# Altium PCB PCB.PcbDoc
Units mil, origin at the board's own origin, x right, y up, seen from the top; angles counter-clockwise.
Board outline 5780 x 8360 mil, 2 copper layers (Top Layer, Bottom Layer); 141 components, 130 nets, 576 pads, 12 vias.
Unrouted connection lines stored in the file: 380.
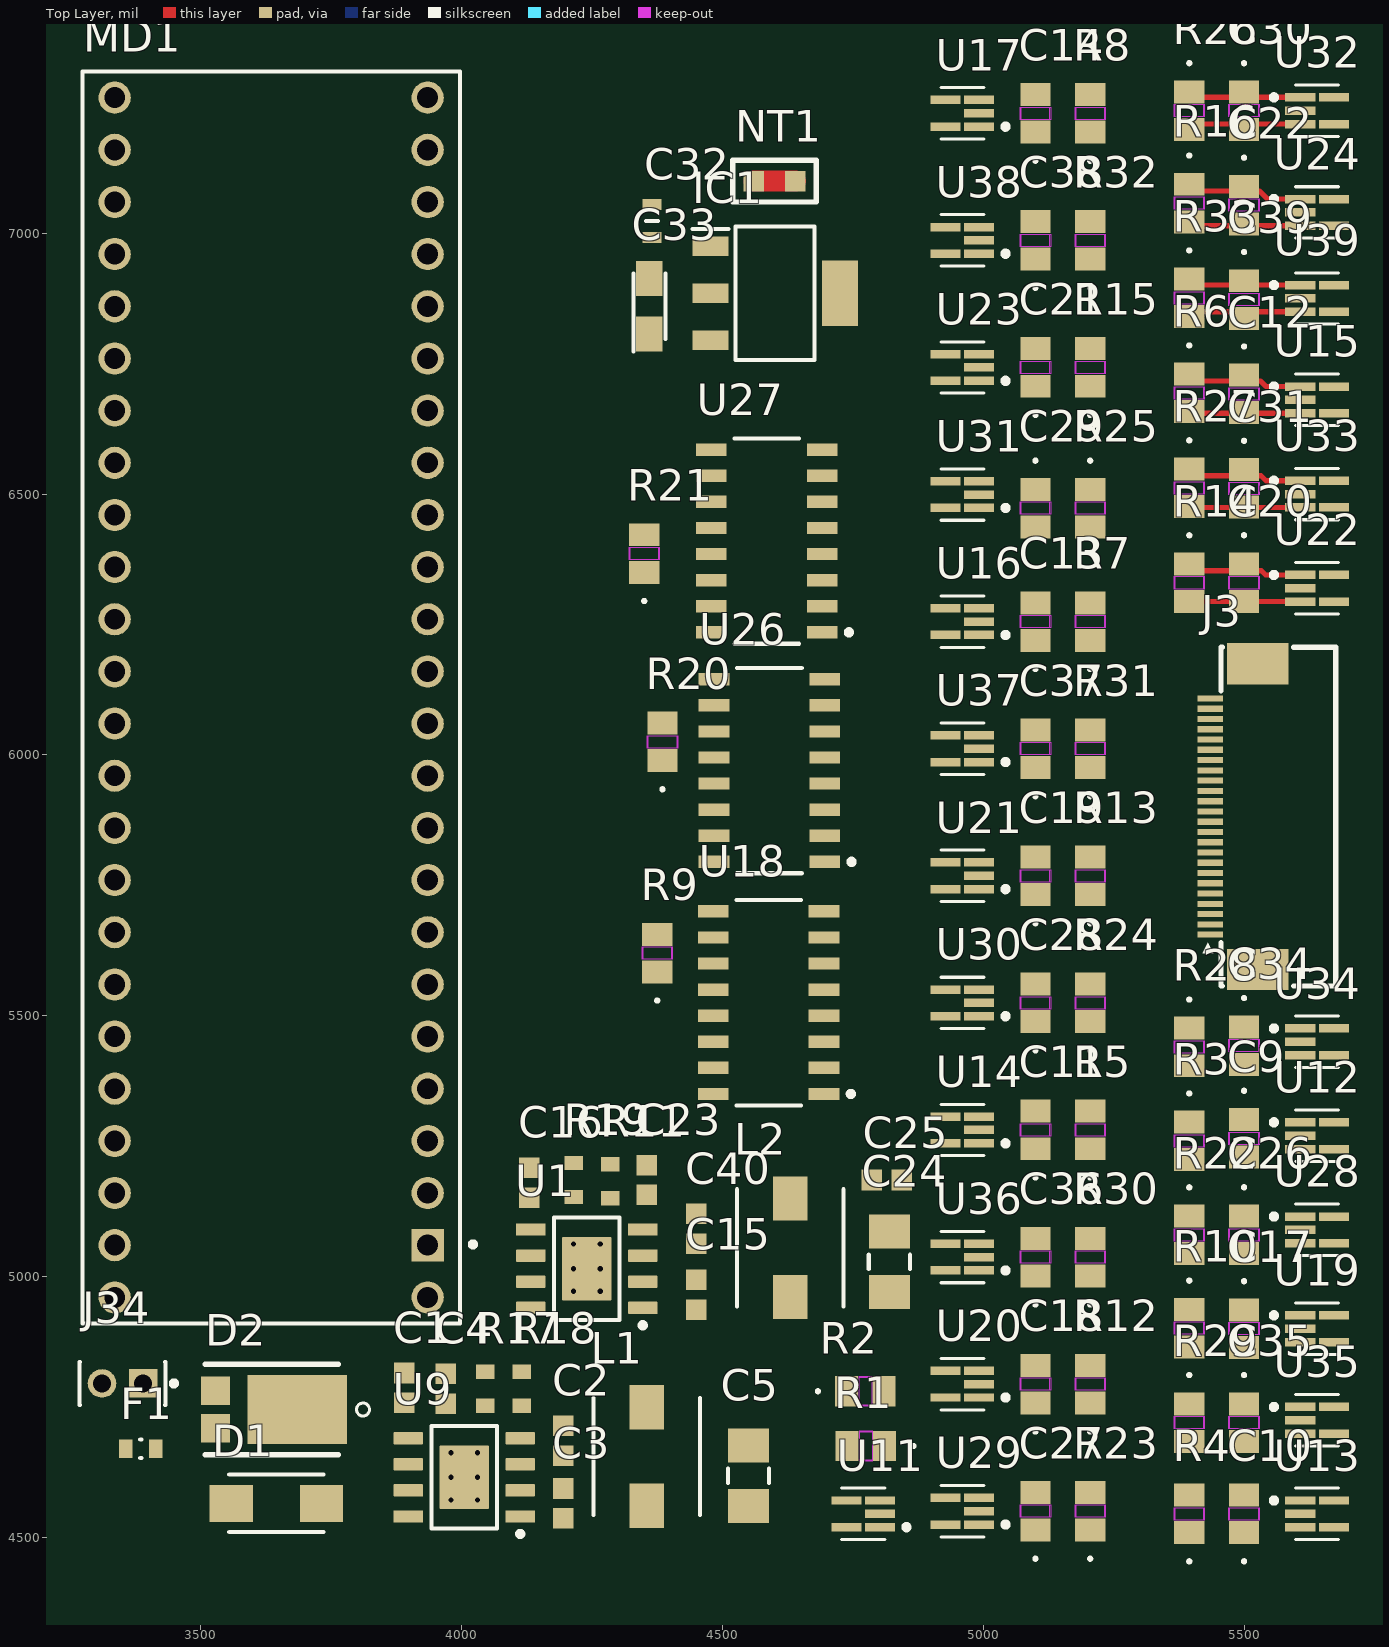
[diagram p0: Top Layer view]
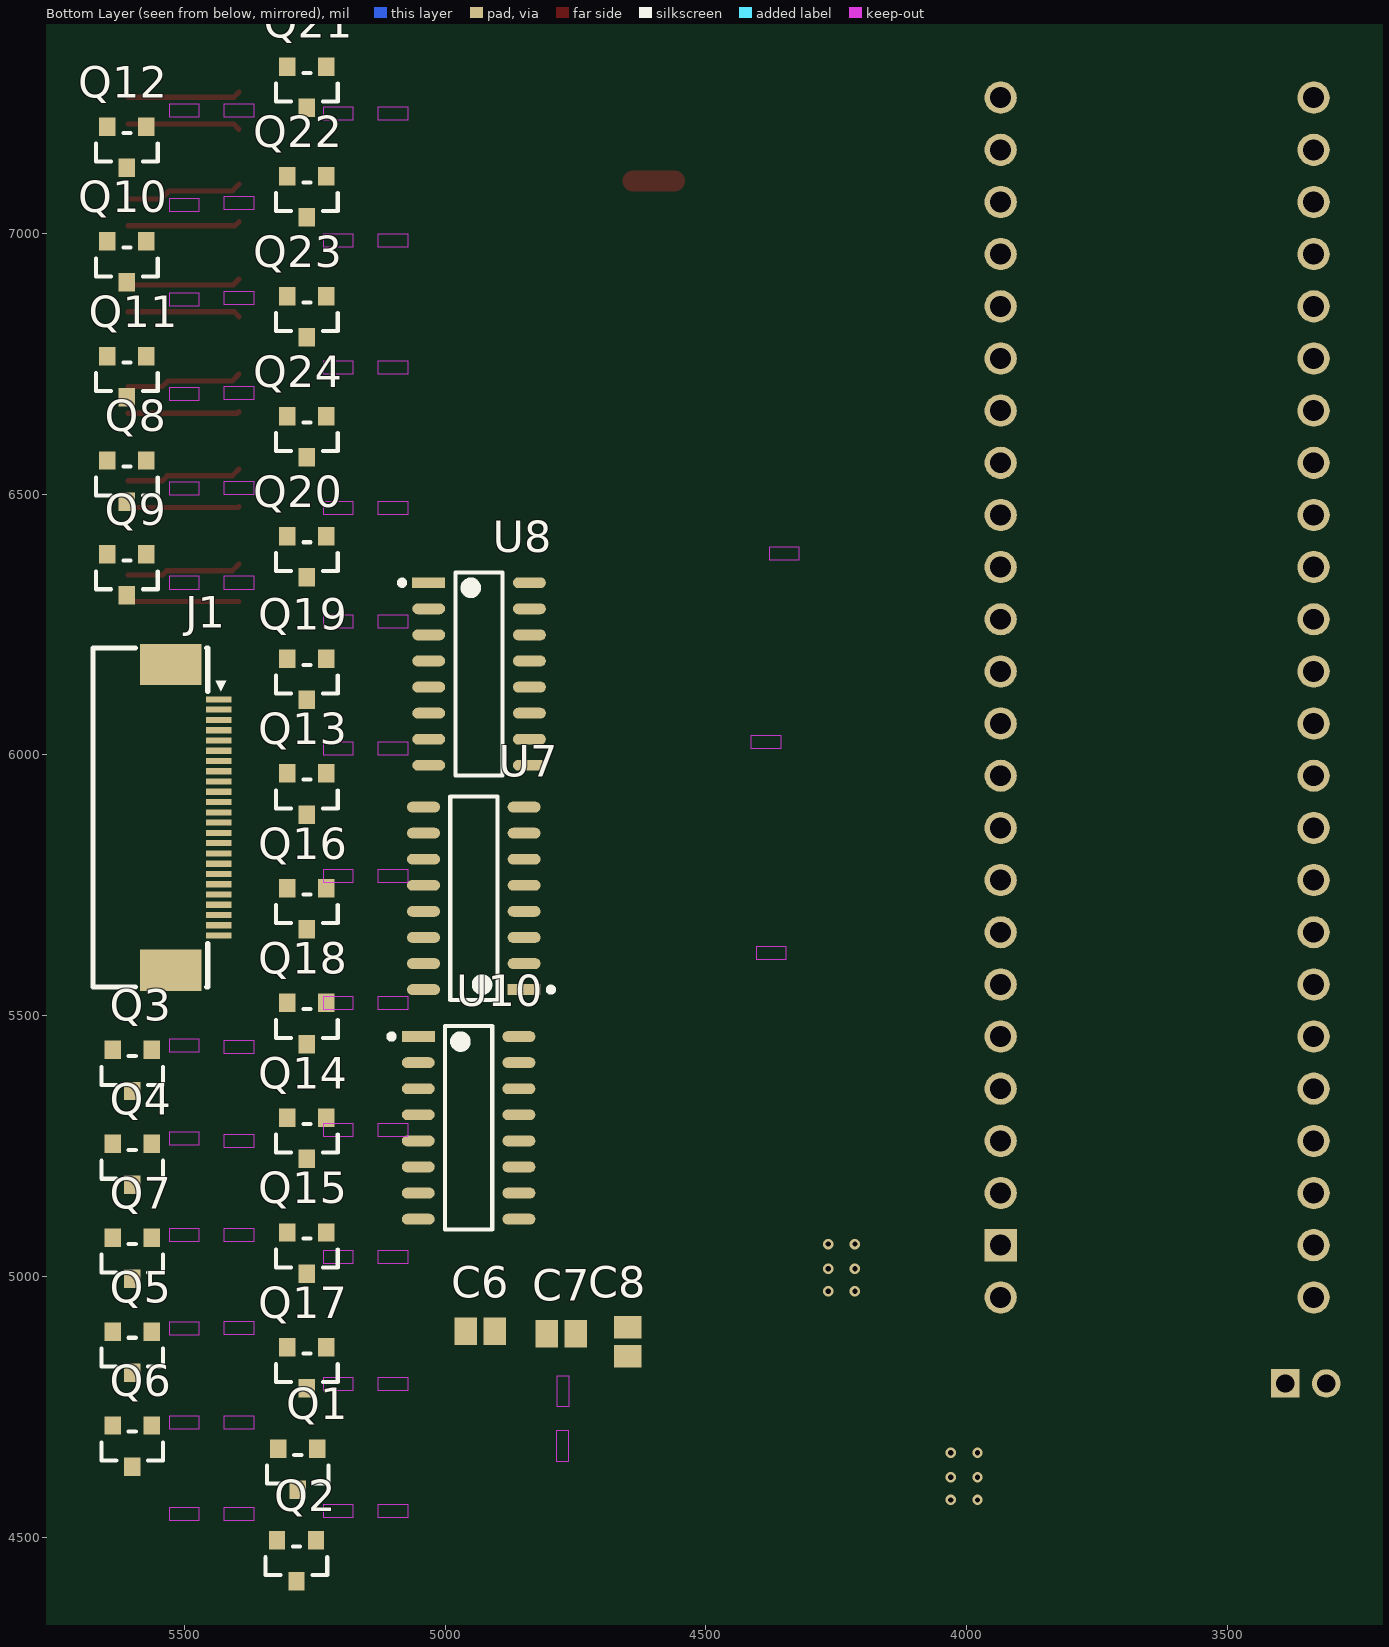
[diagram p1: Bottom Layer view, seen from below]

## Layer stack, top to bottom
Top Solder: solder mask 0.4, Solder Resist, Dk 3.5
Top Layer: signal copper 1.4
Dielectric 1: dielectric 12.6, FR-4, Dk 4.8
Bottom Layer: signal copper 1.4
Bottom Solder: solder mask 0.4, Solder Resist, Dk 3.5

## Board outline
0,1510 0,9870 5780,9870 5780,1510

## Design rules (kind name [scope] priority, off if disabled: settings)
BoardOutlineClearance [All] p1: gap=50 ignorepadtopadclearanceinfootprint=FALSE except(0: Arc-OutlineEdge Track-OutlineEdge Text-OutlineEdge; 20: SMDPad-OutlineEdge THPad-OutlineEdge Via-OutlineEdge Fill-OutlineEdge Region-OutlineEdge)
Clearance [All] p1: gap=6 ignorepadtopadclearanceinfootprint=FALSE
DiffPairsRouting [All] p1: maxlimit=8 minlimit=8 mostfreqgap=8 toplayer_minwidth=8 toplayer_maxwidth=15 toplayer_prefwidth=15 bottomlayer_minwidth=8 bottomlayer_maxwidth=15 bottomlayer_prefwidth=15 maxuncoupledlength=500
HoleSize [All] p1: absolutevalues=TRUE maxlimit=500 minlimit=10 maxpercent=80.000 minpercent=20.000
MinimumAnnularRing [All] p1: minimumring=5
MinimumSolderMaskSliver [All] p1 off: minsoldermaskwidth=10
NetAntennae NetAntennae_MountingHoles [IsVia And InComponent('M*')] p1: netantennaetolerance=-1
NetAntennae [All] p2: netantennaetolerance=0
PlaneConnect [All] p1: planeconnectstyle=Direct reliefexpansion=20 reliefentries=4 reliefconductorwidth=10 reliefairgap=10
PolygonConnect PolygonConnect_Relief [IsPad and not (InComponent('M*'))] p1: connectstyle=Direct reliefconductorwidth=10 reliefentries=4 polygonreliefangle="90 Angle" airgapwidth=10
PolygonConnect PolygonConnect_Direct [All] p2: connectstyle=Direct reliefconductorwidth=10 reliefentries=4 polygonreliefangle="90 Angle" airgapwidth=10
RoutingVias [All] p1: holewidth=16 width=32 viastyle="Through Hole" minholewidth=10 minwidth=20 maxholewidth=100 maxwidth=200
ShortCircuit "Mounting Hole Exception" [IsVia And InComponent('M*') vs InComponent('M*')] p1: allowed=TRUE
ShortCircuit [All] p2: allowed=FALSE
SilkToSilkClearance [All] p1 off: silktosilkclearance=10
SilkToSolderMaskClearance [IsPad] p1 off: minsilkscreentomaskgap=10 clearancetoexposedcopper=TRUE
SolderMaskExpansion SolderMaskExpansion_via [IsVia] p1: expansion=4 istentingtop=TRUE
SolderMaskExpansion [All] p2: expansion=2 istentingtop=FALSE
Width [All] p1: maxlimit=500 minlimit=6 preferedwidth=10 minimp=50.000000 maximp=50.000000 favimp=50.000000
22 further rules are at their usual default settings.

## Classes and differential pairs
component class Schematic: C1 C2 C4 C5 C32 C33 C39 D1 D2 IC1 NT1 R3 R17 R18 U13

## Components (designator, comment, footprint, x,y, rotation, side; value= is the part's Value field where it differs from the comment)
C1 "10uF" CAP_SM0603_YAGEOCC2_N 3890,4786.38 r90 top
C2 "2.2uF" CAP_SM0603_YAGEOCC2_N 4195,4685 r90 top
C3 "100nF" CAP_SM0603_YAGEOCC2_N 4195,4565 r270 top
C4 "47pF" CAP_SM0603_YAGEOCC2_N 3970,4785 r270 top
C5 "100uF" FP-GRM31C-0_3-e0_3_0_8-IPC_A 4550,4618.09 r270 top
C6 "100pF" CAPC2013X140X50LL20T25 4932.56,4895 r180 bottom
C7 "100pF" CAPC2013X140X50LL20T25 4777.56,4890 r180 bottom
C8 "100pF" CAPC2013X140X50LL20T25 4650,4875 r90 bottom
C9 "Capacitor" CAP_R15_JOD 5500,5265 r270 top value=10pF
C10 "Capacitor" CAP_R15_JOD 5500,4545 r90 top value=10pF
C11 "Capacitor" CAP_R15_JOD 5100,5280.91 r90 top value=10pF
C12 "Capacitor" CAP_R15_JOD 5500,6692 r270 top value=10pF
C13 "Capacitor" CAP_R15_JOD 5100,6255.45 r90 top value=10pF
C14 "Capacitor" CAP_R15_JOD 5100,7230 r90 top value=10pF
C15 "100nF" CAP_SM0603_YAGEOCC2_N 4450,4965 r270 top
C16 "10uF" CAP_SM0603_YAGEOCC2_N 4130,5180 r90 top
C17 "Capacitor" CAP_R15_JOD 5500,4900 r270 top value=10pF
C18 "Capacitor" CAP_R15_JOD 5100,4793.64 r90 top value=10pF
C19 "Capacitor" CAP_R15_JOD 5100,5768.18 r90 top value=10pF
C20 "Capacitor" CAP_R15_JOD 5500,6330 r270 top value=10pF
C21 "Capacitor" CAP_R15_JOD 5100,6742.73 r90 top value=10pF
C22 "Capacitor" CAP_R15_JOD 5500,7054 r270 top value=10pF
C23 "75pF" CAP_SM0603_YAGEOCC2_N 4355,5185 r270 top
C24 "100uF" FP-GRM31C-0_3-e0_3_0_8-IPC_A 4820,5028.09 r90 top
C25 "47uF" CAP_SM0603_YAGEOCC2_N 4815,5185 r180 top
C26 "Capacitor" CAP_R15_JOD 5500,5080 r270 top value=10pF
C27 "Capacitor" CAP_R15_JOD 5100,4550 r90 top value=10pF
C28 "Capacitor" CAP_R15_JOD 5100,5524.55 r90 top value=10pF
C29 "Capacitor" CAP_R15_JOD 5100,6473.09 r270 top value=10pF
C30 "Capacitor" CAP_R15_JOD 5500,7235 r270 top value=10pF
C31 "Capacitor" CAP_R15_JOD 5500,6511 r270 top value=10pF
C32 "470nF" CAPC1608X90N 4365,7023.5 r270 top
C33 "47uF" CAPPM3216X180N 4360,6860 r90 top
C34 "Capacitor" CAP_R15_JOD 5500,5442.76 r270 top value=10pF
C35 "Capacitor" CAP_R15_JOD 5500,4720 r270 top value=10pF
C36 "Capacitor" CAP_R15_JOD 5100,5037.27 r90 top value=10pF
C37 "Capacitor" CAP_R15_JOD 5100,6011.82 r90 top value=10pF
C38 "Capacitor" CAP_R15_JOD 5100,6986.36 r90 top value=10pF
C39 "Capacitor" CAP_R15_JOD 5500,6873 r270 top value=10pF
C40 "2.2uF" CAP_SM0603_YAGEOCC2_N 4450,5091.38 r270 top
D1 "SMAJ30CA" LFUS-DO-214AC-A-2_V 3645,4565 r180 top
D2 "SBRT15U50SP5-13" SBRT15U50SP5-13 3685,4745 r270 top
F1 "500mA" FP-SF-0603S-MFG 3385,4670 r0 top value=232mΩ
IC1 "LM3940IMPX-3.3_NOPB" SOT230P700X180-4N 4600.98,6885 r0 top
J1 "690367282476" FPC-SMD_24P-P0.50_05A20L24P 5480,5880 r270 bottom
J3 "690367282476" FPC-SMD_24P-P0.50_05A20L24P 5480.77,5881.73 r90 top
J34 "TMM-102-03-F-S" FP-TMM-102-03-F-S-MFG 3350,4795 r180 top
L1 "SRP5030TA-100M, 10uH" INDPM5752X300N 4355,4655 r90 top
L2 "6.8uH" INDPM5752X300N 4630,5055 r90 top
MD1 "DEV-16996" FP-DEV-16996-MFG 3635,6110 r90 top
NT1 "Net Tie" Net_Tie_80mil 4560,7100 r0 top net-tie
Q1 "DMP2004K-7" FP-SOT23-MFG 5282.4,4630.63 r270 bottom
Q2 "DMP2004K-7" FP-SOT23-MFG 5285,4455 r270 bottom
Q3 "DMP2004K-7" FP-SOT23-MFG 5600,5395 r270 bottom
Q4 "DMP2004K-7" FP-SOT23-MFG 5600,5215 r270 bottom
Q5 "DMP2004K-7" FP-SOT23-MFG 5600,4855 r270 bottom
Q6 "DMP2004K-7" FP-SOT23-MFG 5600,4675 r270 bottom
Q7 "DMP2004K-7" FP-SOT23-MFG 5600,5035 r270 bottom
Q8 "DMP2004K-7" FP-SOT23-MFG 5610,6525 r270 bottom
Q9 "DMP2004K-7" FP-SOT23-MFG 5610,6345 r270 bottom
Q10 "DMP2004K-7" FP-SOT23-MFG 5610,6945 r270 bottom
Q11 "DMP2004K-7" FP-SOT23-MFG 5610,6725 r270 bottom
Q12 "DMP2004K-7" FP-SOT23-MFG 5610,7165 r270 bottom
Q13 "DMP2004K-7" FP-SOT23-MFG 5265,5925 r270 bottom
Q14 "DMP2004K-7" FP-SOT23-MFG 5265,5265 r270 bottom
Q15 "DMP2004K-7" FP-SOT23-MFG 5265,5045 r270 bottom
Q16 "DMP2004K-7" FP-SOT23-MFG 5265,5705 r270 bottom
Q17 "DMP2004K-7" FP-SOT23-MFG 5265,4825 r270 bottom
Q18 "DMP2004K-7" FP-SOT23-MFG 5265,5485 r270 bottom
Q19 "DMP2004K-7" FP-SOT23-MFG 5265,6145 r270 bottom
Q20 "DMP2004K-7" FP-SOT23-MFG 5265,6380 r270 bottom
Q21 "DMP2004K-7" FP-SOT23-MFG 5265,7280 r270 bottom
Q22 "DMP2004K-7" FP-SOT23-MFG 5265,7070 r270 bottom
Q23 "DMP2004K-7" FP-SOT23-MFG 5265,6840 r270 bottom
Q24 "DMP2004K-7" FP-SOT23-MFG 5265,6610 r270 bottom
R1 "Resistor" CAP_R15_JOD 4775,4675 r180 top value=10K
R2 "Resistor" CAP_R15_JOD 4774,4780 r0 top value=15K
R3 "Resistor" CAP_R15_JOD 5395,5260 r270 top value=180
R4 "Resistor" CAP_R15_JOD 5395,4545 r90 top value=180
R5 "Resistor" CAP_R15_JOD 5205,5280.91 r90 top value=180
R6 "Resistor" CAP_R15_JOD 5395,6694 r270 top value=180
R7 "Resistor" CAP_R15_JOD 5205,6255.45 r90 top value=180
R8 "Resistor" CAP_R15_JOD 5205,7230 r90 top value=180
R9 "Resistor" CAP_R15_JOD 4375,5620 r90 top value=10k
R10 "Resistor" CAP_R15_JOD 5395,4901 r270 top value=180
R11 "51k 0.1%" RES_SM0603_YAGEORC_N 4285,5182.44 r90 top value=1K
R12 "Resistor" CAP_R15_JOD 5205,4793.64 r90 top value=180
R13 "Resistor" CAP_R15_JOD 5205,5768.18 r90 top value=180
R14 "Resistor" CAP_R15_JOD 5395,6330 r270 top value=180
R15 "Resistor" CAP_R15_JOD 5205,6742.73 r90 top value=180
R16 "Resistor" CAP_R15_JOD 5395,7058 r270 top value=180
R17 "88K7" RES_SM0603_YAGEORC_N 4045,4785 r90 top
R18 "22K1" RES_SM0603_YAGEORC_N 4115,4785 r270 top
R19 "22k1 0.1%" RES_SM0603_YAGEORC_N 4215,5185 r270 top value=1K
R20 "Resistor" CAP_R15_JOD 4385,6025 r90 top value=10K
R21 "Resistor" CAP_R15_JOD 4350,6386 r90 top value=10K
R22 "Resistor" CAP_R15_JOD 5395,5080 r270 top value=180
R23 "Resistor" CAP_R15_JOD 5205,4550 r90 top value=180
R24 "Resistor" CAP_R15_JOD 5205,5524.55 r90 top value=180
R25 "Resistor" CAP_R15_JOD 5205,6473.09 r270 top value=180
R26 "Resistor" CAP_R15_JOD 5395,7235 r270 top value=180
R27 "Resistor" CAP_R15_JOD 5395,6512 r270 top value=180
R28 "Resistor" CAP_R15_JOD 5395,5440 r270 top value=180
R29 "Resistor" CAP_R15_JOD 5395,4720 r270 top value=180
R30 "Resistor" CAP_R15_JOD 5205,5037.27 r90 top value=180
R31 "Resistor" CAP_R15_JOD 5205,6011.82 r90 top value=180
R32 "Resistor" CAP_R15_JOD 5205,6986.36 r90 top value=180
R33 "Resistor" CAP_R15_JOD 5395,6876 r270 top value=180
U1 "LMR23630-Q1" DDA0008E_N 4240,5015 r180 top
U7 "74HC595D,118" FP-SOT109-1-IPC_C 4945,5725 r0 bottom
U8 "74HC595D,118" FP-SOT109-1-IPC_C 4935,6155 r180 bottom
U9 "LMR23630-Q1" DDA0008E_N 4005,4615 r180 top
U10 "74HC595D,118" FP-SOT109-1-IPC_C 4955,5285 r180 bottom
U11 "Ideal Operational Amplifier" DCK0005A-IPC_B 4770,4545 r180 top
U12 "Ideal Operational Amplifier" DCK0005A-IPC_B 5640,5270 r0 top
U13 "Ideal Operational Amplifier" DCK0005A-IPC_B 5640,4545 r0 top
U14 "Ideal Operational Amplifier" DCK0005A-IPC_B 4960,5280.91 r180 top
U15 "Ideal Operational Amplifier" DCK0005A-IPC_B 5640,6680.59 r0 top
U16 "Ideal Operational Amplifier" DCK0005A-IPC_B 4960,6255.45 r180 top
U17 "Ideal Operational Amplifier" DCK0005A-IPC_B 4960,7230 r180 top
U18 "MCP3008T-I/SL" FP-C04-108-MFG 4588.7,5525 r180 top
U19 "Ideal Operational Amplifier" DCK0005A-IPC_B 5640,4900 r0 top
U20 "Ideal Operational Amplifier" DCK0005A-IPC_B 4960,4793.64 r180 top
U21 "Ideal Operational Amplifier" DCK0005A-IPC_B 4960,5768.18 r180 top
U22 "Ideal Operational Amplifier" DCK0005A-IPC_B 5640,6319.41 r0 top
U23 "Ideal Operational Amplifier" DCK0005A-IPC_B 4960,6742.73 r180 top
U24 "Ideal Operational Amplifier" DCK0005A-IPC_B 5640,7040 r0 top
U26 "MCP3008T-I/SL" FP-C04-108-MFG 4590,5970 r180 top
U27 "MCP3008T-I/SL" FP-C04-108-MFG 4585,6410 r180 top
U28 "Ideal Operational Amplifier" DCK0005A-IPC_B 5640,5089.41 r0 top
U29 "Ideal Operational Amplifier" DCK0005A-IPC_B 4960,4550 r180 top
U30 "Ideal Operational Amplifier" DCK0005A-IPC_B 4960,5524.55 r180 top
U31 "Ideal Operational Amplifier" DCK0005A-IPC_B 4960,6499.09 r180 top
U32 "Ideal Operational Amplifier" DCK0005A-IPC_B 5640,7235 r0 top
U33 "Ideal Operational Amplifier" DCK0005A-IPC_B 5640,6500 r0 top
U34 "Ideal Operational Amplifier" DCK0005A-IPC_B 5640,5450 r0 top
U35 "Ideal Operational Amplifier" DCK0005A-IPC_B 5640,4724.41 r0 top
U36 "Ideal Operational Amplifier" DCK0005A-IPC_B 4960,5037.27 r180 top
U37 "Ideal Operational Amplifier" DCK0005A-IPC_B 4960,6011.82 r180 top
U38 "Ideal Operational Amplifier" DCK0005A-IPC_B 4960,6986.36 r180 top
U39 "Ideal Operational Amplifier" DCK0005A-IPC_B 5640,6875 r0 top

## Footprints (in the part's own frame and the unit in brackets; to place one, negate y for a bottom-side part, rotate by r counter-clockwise, add the part's x,y. Pads: shape width x height; smd on the part's side, far side on the other; paste and mask are expansions set on the pad)
CAP_R15_JOD [mil]
  rect 44x58 smd paste+0 mask+0: 1(-36,0) 2(36,0)
  Top Layer keep-out region: -12,-27 -12,27 12,27 12,-27
  Keep-Out Layer region: -12,-29 -12,29 12,29 12,-29
  silkscreen extent -94,-3 -88,3, body extent -44,-29 44,29, height 46
CAP_SM0603_YAGEOCC2_N [mm] "Capacitor, Yageo CC Class2, SM0603, IPC Medium Density"
  rect 1x1 smd: 1(-0.727,0) 2(0.727,0)
  body extent -0.9,-0.5 0.9,0.5, height 0.9
CAPC1608X90N [mm]
  rect 0.54x0.94 smd: 1(-0.8,0) 2(0.8,0)
  silkscreen extent 0,-0.3 0,0.3, body extent -0.8,-0.4 0.8,0.4, height 0.9
CAPC2013X140X50LL20T25 [mm] "Chip Capacitor, 2-Leads, Body 2.00x1.25mm, IPC High Density"
  rect 1.1x1.35 smd: 1(-0.7,0) 2(0.7,0)
  body extent -1.1,-0.72 1.1,0.72, height 1.4
CAPPM3216X180N [mm]
  rect 1.7x1.3 smd: 1(-1.35,0) 2(1.35,0)
  silkscreen extent -2.2,-0.77 1.6,0.77, body extent -1.6,-0.77 1.6,0.77, height 1.8
DCK0005A-IPC_B [mm]
  rect 1.464x0.412 smd paste+0 mask+0: 1(-0.82,0.65) 2(-0.82,0) 3(-0.82,-0.65) 4(0.82,-0.65) 5(0.82,0.65)
  silkscreen extent -2.23,-1.25 1.05,1.25
DDA0008E_N [mm] "SOP, 8-Leads, Body 4x5mm, Pitch 1.27mm, Thermal Pad 2.4x3.1mm, IPC Medium Density"
  rrect17% 1.45x0.6 smd: 1(-2.725,1.905) 2(-2.725,0.635) 3(-2.725,-0.635) 4(-2.725,-1.905) 5(2.725,-1.905) 6(2.725,-0.635) 7(2.725,0.635) 8(2.725,1.905)
  rrect4% 2.4x3.1 smd: 9(0,0)
  silkscreen extent -2.85,-2.5 1.6,2.88, body extent -2.98,-2.45 2.98,2.45, height 1.5
FP-C04-108-MFG [mm]
  rect 1.5x0.6 smd paste+0 mask+0: 1(-2.7,4.445) 2(-2.7,3.175) 3(-2.7,1.905) 4(-2.7,0.635) 5(-2.7,-0.635) 6(-2.7,-1.905) 7(-2.7,-3.175) 8(-2.7,-4.445) 9(2.7,-4.445) 10(2.7,-3.175) 11(2.7,-1.905) 12(2.7,-0.635) 13(2.7,0.635) 14(2.7,1.905) 15(2.7,3.175) 16(2.7,4.445)
  silkscreen extent -4.12,-5 1.58,5, body extent -3.55,-5.25 3.55,5.25, height 0.25
FP-DEV-16996-MFG [mm]
  rect 1.57x1.57 hole 1.02 paste-2539.97 mask+0: 0(-26.67,-7.62)
  round 1.57 hole 1.02 paste-2539.97 mask+0: 1(-24.13,-7.62) 2(-21.59,-7.62) 3(-19.05,-7.62) 4(-16.51,-7.62) 5(-13.97,-7.62) 6(-11.43,-7.62) 7(-8.89,-7.62) 8(-6.35,-7.62) 9(-3.81,-7.62) 10(-1.27,-7.62) 11(1.27,-7.62) 12(3.81,-7.62) 13(3.81,7.62) 14(1.27,7.62) 15(-1.27,7.62) 16(-3.81,7.62) 17(-6.35,7.62) 18(-8.89,7.62) 19(-11.43,7.62) 20(-13.97,7.62) 21(-16.51,7.62) 22(-19.05,7.62) 23(-21.59,7.62) 24(8.89,-7.62) 25(11.43,-7.62) 26(13.97,-7.62) 27(16.51,-7.62) 28(19.05,-7.62) 29(21.59,-7.62) 30(24.13,-7.62) 31(26.67,-7.62) 32(29.21,-7.62) 33(29.21,7.62) 34(26.67,7.62) 35(24.13,7.62) 36(21.59,7.62) 37(19.05,7.62) 38(16.51,7.62) 39(13.97,7.62) 40(11.43,7.62) 41(8.89,7.62) 42(-29.21,7.62) 43(-26.67,7.62) 44(-24.13,7.62) 45(6.35,7.62) 46(-29.21,-7.62) 47(6.35,-7.62)
  silkscreen extent -30.48,-9.95 30.48,9.19, body extent -30.58,-9.29 30.58,9.29, height 0.25
FP-GRM31C-0_3-e0_3_0_8-IPC_A [mil]
  rect 65.1x78.9 smd paste+0 mask+0: 1(-58.09,0) 2(58.09,0)
  silkscreen extent -14,-39 14,39, body extent -110,-59 110,59, height 10
FP-SF-0603S-MFG [mm]
  rect 0.65x0.9 smd paste+0 mask+0: 1(-0.725,0) 2(0.725,0)
  silkscreen extent -0.03,-0.45 0.03,0.45, body extent -1.15,-0.55 1.15,0.55, height 0.25
FP-SOT23-MFG [mm]
  rect 0.9x0.8 smd paste+0 mask+0: 1(-1,0.95) 2(-1,-0.95) 3(1,0)
  silkscreen extent -0.7,-1.5 0.7,1.5, body extent -1.2,-1.45 1.2,1.45, height 1.11
FP-SOT109-1-IPC_C [mil]
  rect 63.17x20.79 smd paste+0 mask+0: 1(-96.49,175)
  rrect100% 63.17x20.79 smd paste+0 mask+0: 2(-96.49,125) 3(-96.49,75) 4(-96.49,25) 5(-96.49,-25) 6(-96.49,-75) 7(-96.49,-125) 8(-96.49,-175) 9(96.49,-175) 10(96.49,-125) 11(96.49,-75) 12(96.49,-25) 13(96.49,25) 14(96.49,75) 15(96.49,125) 16(96.49,175)
  silkscreen extent -153,-195 45,195, body extent -118,-195 118,195, height 69
FP-TMM-102-03-F-S-MFG [mm]
  rect 1.39x1.39 hole 0.89 paste-2539.97 mask+0: 1(-1,0)
  round 1.39 hole 0.89 paste-2539.97 mask+0: 2(1,0)
  silkscreen extent -2.63,-1.05 2.1,1.05, body extent -2.1,-2.07 2.1,2.07, height 0.25
FPC-SMD_24P-P0.50_05A20L24P [mm]
  rect 0.3x1.25 smd paste+0 mask+0.05: 1(-5.75,1.162) 2(-5.25,1.162) 3(-4.75,1.162) 4(-4.25,1.162) 5(-3.75,1.162) 6(-3.25,1.162) 7(-2.75,1.162) 8(-2.25,1.162) 9(-1.75,1.162) 10(-1.25,1.162) 11(-0.75,1.162) 12(-0.25,1.162) 13(0.25,1.162) 14(0.75,1.162) 15(1.25,1.162) 16(1.75,1.162) 17(2.25,1.162) 18(2.75,1.162) 19(3.25,1.162) 20(3.75,1.162) 21(4.25,1.162) 22(4.75,1.162) 23(5.25,1.162) 24(5.75,1.162)
  rect 2x3 smd paste+0 mask+0.05: 25(7.44,-1.162) 26(-7.44,-1.162)
  silkscreen extent -8.25,-4.96 8.25,1.52
INDPM5752X300N [mm]
  rect 2.15x1.7 smd: 1(-2.4,0) 2(2.4,0)
  silkscreen extent -2.85,-2.6 2.85,2.6, body extent -2.85,-2.6 2.85,2.6, height 2.81
LFUS-DO-214AC-A-2_V [mm] "Molded Diode, 2-Leads, Body 4.6x2.79mm"
  rect 2.1x1.8 smd: 1(-2.2,0) 2(2.2,0)
  silkscreen extent -2.3,-1.4 2.3,1.4, body extent -2.52,-1.4 2.52,1.4, height 2.29
Net_Tie_80mil [mm]
  rect 1x1 smd: 1(0,0) 2(2.032,0)
  Top Layer lines w1.016: 0,0 2.032,0
  silkscreen extent -1.02,-1.02 3.05,1.02
RES_SM0603_YAGEORC_N [mm] "Resistor, Yageo RC_L, SM0603, IPC Medium Density"
  rect 0.7x0.9 smd: 1(-0.827,0) 2(0.827,0)
  body extent -0.85,-0.45 0.85,0.45, height 0.55
SBRT15U50SP5-13 [mm]
  rect 1.39x1.4 smd: 1(-0.92,-3.982) 1(0.92,-3.982)
  rect 3.36x4.86 smd: 2(0,0)
  silkscreen extent -2.2,-4.5 2.2,3.52, body extent -2,-4.6 2,2.4, height 1.05
SOT230P700X180-4N [mm]
  rect 1.75x0.95 smd: 1(-3.15,2.3) 2(-3.15,0) 3(-3.15,-2.3)
  rect 1.75x3.2 smd: 4(3.15,0)
  silkscreen extent -4.03,-3.25 1.92,3.25

## Part data
C1 C16: library part GRM188R6YA106MA73D, "Ceramic Capacitor, Multilayer, Ceramic, 35V, 20% +Tol, 20% -Tol, X5R, 15% TC, 10uF, Surface Mount, 0603", Capacitor Type=Ceramic, Case/Package=0603, Manufacturer=Murata, Max Operating Temperature=85°C, Min Operating Temperature=-55°C, Package Shape=Rectangular, Rated DC Voltage (URdc)=35V, Temperature Characteristics Code=X5R, Tolerance  (fill in as +-)=20%, Category="Ceramic Capacitors", ComponentLink1Description=https://datasheet.ciiva.com:443/pdfs/VipMasterIC/IC/MURE/MURE-S-A0004349797/MURE-S-A0004352457-1.pdf?src-supplier=IHS+Markit, ComponentLink1URL=https://datasheet.ciiva.com:443/pdfs/VipMasterIC/IC/MURE/MURE-S-A0004349797/MURE-S-A0004352457-1.pdf?src-supplier=IHS+Markit, ComponentLink2Description=http://search.murata.co.jp/Ceramy/image/img/A01X/G101/ENG/GRM188R6YA106MA73-01.pdf?src-supplier=Digikey, ComponentLink2URL=http://search.murata.co.jp/Ceramy/image/img/A01X/G101/ENG/GRM188R6YA106MA73-01.pdf?src-supplier=Digikey, ComponentLink3Description=https://www.murata.com/~/media/webrenewal/support/library/catalog/products/capacitor/mlcc/c02e.ashx?la=en-us&src-supplier=Digikey, ComponentLink3URL=https://www.murata.com/~/media/webrenewal/support/library/catalog/products/capacitor/mlcc/c02e.ashx?la=en-us&src-supplier=Digikey, ComponentLink4Description=https://datasheet.octopart.com/GRM188R6YA106MA73D-Murata-datasheet-149523261.pdf?src-supplier=Newark, ComponentLink4URL=https://datasheet.octopart.com/GRM188R6YA106MA73D-Murata-datasheet-149523261.pdf?src-supplier=Newark, ComponentLink5Description=https://datasheet.octopart.com/GRM188R6YA106MA73D-Murata-datasheet-86813743.pdf?src-supplier=Future+Electronics, ComponentLink5URL=https://datasheet.octopart.com/GRM188R6YA106MA73D-Murata-datasheet-86813743.pdf?src-supplier=Future+Electronics, ComponentLink6Description=http://search.murata.co.jp/Ceramy/image/img/A01X/G101/ENG/GRM188R6YA106MA73-01.pdf?src-supplier=Future+Electronics, ComponentLink6URL=http://search.murata.co.jp/Ceramy/image/img/A01X/G101/ENG/GRM188R6YA106MA73-01.pdf?src-supplier=Future+Electronics, ComponentLink7Description=http://search.murata.co.jp/Ceramy/image/img/A01X/G101/ENG/GRM188R6YA106MA73-01.pdf?src-supplier=Mouser, ComponentLink7URL=http://search.murata.co.jp/Ceramy/image/img/A01X/G101/ENG/GRM188R6YA106MA73-01.pdf?src-supplier=Mouser, ComponentLink8Description=http://search.murata.co.jp/Ceramy/image/img/A01X/G101/ENG/GRM188R6YA106MA73-01.pdf?src-supplier=TTI, ComponentLink8URL=http://search.murata.co.jp/Ceramy/image/img/A01X/G101/ENG/GRM188R6YA106MA73-01.pdf?src-supplier=TTI, ComponentLink9Description=https://datasheet.octopart.com/GRM188R6YA106MA73D-Murata-datasheet-165579666.pdf?src-supplier=TME, ComponentLink9URL=https://datasheet.octopart.com/GRM188R6YA106MA73D-Murata-datasheet-165579666.pdf?src-supplier=TME, Dielectric Material=Ceramic, JESD-609 Code=e3, Manufacturer Part Number=GRM188R6YA106MA73D, Mounting Technology="Surface Mount", Multilayer=Yes, Packaging="Tape and Reel", Pins=2, Pricing="4000=0.0516, 8000=0.043, 24000=0.0355 (USD)", Reach SVHC Compliant=Yes, RoHS=Yes, RoHS Compliant=Yes, Stock=56000, Supplier="Arrow Electronics", Supplier Part Number=GRM188R6YA106MA73D, Terminal Finish=Nickel, Termination=Wraparound, Tolerance (fill in as +-)=20%
C2 C40: library part CC0603KRX5R8BB225, "CAP CER 2.2UF 25V X5R 0603", Manufacturer=Yageo, Manufacturer Part Number=CC0603KRX7R9BB183, Package=0603, Supplier Part Number 1=3019743, Tolerance (%)=10, Voltage Rating (Volts)=50, Category=Capacitor, ComponentLink1Description="Manufacturer Website", ComponentLink1URL=http://www.yageo.com, Supplier 1=Farnell, Supplier 2=Digi-Key
C3 C15: library part CC0603KRX7R9BB104, "CAP 100nF SM0603 X7R 50V YAGEO CC2", Manufacturer=Yageo, Package=0603, Supplier Part Number 1=1362556, Tolerance (%)=10, Voltage Rating (Volts)=50, Category=Capacitor, ComponentLink1Description="Manufacturer Website", ComponentLink1URL=http://www.yageo.com, Manufacturer Part Number=CC0603KRX7R9BB104, Supplier 1=Farnell, Supplier 2=Digi-Key, Supplier Part Number 2=311-1344-1-ND
C4: library part CC0603JRNPO9BN470, "CAP 47pF SM0603 NPO 50V YAGEO CC2", Manufacturer=Yageo, Package=0603, Supplier Part Number 1=722042, Tolerance (%)=5, Voltage Rating (Volts)=50, Category=Capacitor, ComponentLink1Description="Manufacturer Website", ComponentLink1URL=http://www.yageo.com, Manufacturer Part Number=CC0603JRNPO9BN470, Supplier 1=Farnell, Supplier 2=Digi-Key, Supplier Part Number 2=311-1065-1-ND
C5: library part GRM31CR61A107MEA8L, "Ceramic Capacitor, Multilayer, Ceramic, 10V, 20% +Tol, 20% -Tol, X5R, 15% TC, 100uF, Surface Mount, 1206", Manufacturer=Murata, Category="Ceramic Capacitors", ComponentLink1Description=https://datasheet.octopart.com/GRM31CR61A107MEA8L-Murata-datasheet-165579666.pdf?src-supplier=TME, ComponentLink1URL=https://datasheet.octopart.com/GRM31CR61A107MEA8L-Murata-datasheet-165579666.pdf?src-supplier=TME, Manufacturer Part Number=GRM31CR61A107MEA8L, Pricing="2000=0.1239, 10000=0.1122, 50000=0.0993 (USD)", RoHS=Yes, RoHS Compliant=Yes, Stock=6000, Supplier="Arrow Electronics", Supplier Part Number=GRM31CR61A107MEA8L
C6 C7 C8: library part CMP-2007-04674-1, Manufacturer="AVX Interconnect / Elco", Part Number=0805ZC105KAZ2A
C23: library part CC0603JRNPO9BN750, "CAP 75pF SM0603 NPO 50V YAGEO CC2", Manufacturer=Yageo, Manufacturer Part Number=CC0603JRNPO9BN820, Package=0603, Supplier Part Number 1=722078, Tolerance (%)=5, Voltage Rating (Volts)=50, Category=Capacitor, ComponentLink1Description="Manufacturer Website", ComponentLink1URL=http://www.yageo.com, Supplier 1=Farnell, Supplier 2=Digi-Key, Supplier Part Number 2=311-1068-1-ND
C24: library part GRM31CR61A107MEA8L, "Ceramic Capacitor, Multilayer, Ceramic, 10V, 20% +Tol, 20% -Tol, X5R, 15% TC, 100uF, Surface Mount, 1206", Manufacturer=Murata, Supplier Part Number 1=490-GRM31CR61A107MEA8LCT-ND, Category="Ceramic Capacitors", ComponentLink1Description=https://datasheet.octopart.com/GRM31CR61A107MEA8L-Murata-datasheet-165579666.pdf?src-supplier=TME, ComponentLink1URL=https://datasheet.octopart.com/GRM31CR61A107MEA8L-Murata-datasheet-165579666.pdf?src-supplier=TME, Manufacturer Part Number=GRM31CR61A107MEA8L, Pricing="2000=0.1239, 10000=0.1122, 50000=0.0993 (USD)", RoHS=Yes, RoHS Compliant=Yes, Stock=6000, Supplier="Arrow Electronics", Supplier 1=DigiKey, Supplier Part Number=GRM31CR61A107MEA8L
C25: library part CC0603MRX5R4BB476, "CAP 47uF SM0603 X5R 4V YAGEO CC2", Manufacturer=Yageo, Manufacturer Part Number=CC0603KRX7R9BB223, Package=0603, Supplier Part Number 1=3019755, Tolerance (%)=10, Voltage Rating (Volts)=50, Category=Capacitor, ComponentLink1Description="Manufacturer Website", ComponentLink1URL=http://www.yageo.com, Supplier 1=Farnell, Supplier 2=Digi-Key, Supplier Part Number 2=311-1370-1-ND
C32: library part CGA3E3X7R1H474K080AB, "SMD/SMT CGA 0603 50V 0.47uF X7R 10% AEC-Q200", Manufacturer_Name=TDK, Mouser Part Number=810-CGA3E3X7R1H474KB, Arrow Part Number=CGA3E3X7R1H474K080AB, Arrow Price/Stock=https://www.arrow.com/en/products/cga3e3x7r1h474k080ab/tdk, Datasheet Link=http://docs-europe.electrocomponents.com/webdocs/14e9/0900766b814e9125.pdf, Height=0.9mm, Manufacturer_Part_Number=CGA3E3X7R1H474K080AB, Mouser Price/Stock=https://www.mouser.co.uk/ProductDetail/TDK/CGA3E3X7R1H474K080AB?qs=xLDY6iXSiQYK0oGm7fVVjw%3D%3D
C33: library part TLJA476M010R0600, "47uF 10V Tantalum Capacitor For LM3940IMPX-3.3_NOPB LDO", Manufacturer_Name="Kyocera AVX", Mouser Part Number=581-TLJA476M010R0600, Arrow Part Number=TLJA476M010R0600, Arrow Price/Stock=https://www.arrow.com/en/products/tlja476m010r0600/avx, Datasheet Link=https://componentsearchengine.com/Datasheets/1/TLJA476M010R0600.pdf, Height=1.8mm, Manufacturer_Part_Number=TLJA476M010R0600, Mouser Price/Stock=https://www.mouser.co.uk/ProductDetail/AVX/TLJA476M010R0600?qs=o28%2FEEzBmj3NNm8C9jVwcw%3D%3D
D1: "Transient Voltage Suppression Diode, 30 V, -65 to 150 degC, 2-Pin SMD, RoHS, Tape and Reel", Capacitance @ Frequency=-, Current - Peak Pulse (10/1000µs)=8.3A, Manufacturer=Littelfuse, Operating Temperature=-55°C~150°C(TJ), Package / Case=DO-214AC,SMA, Package Description="2-Pin Surface Mount Device, Body 4.295 x 2.595 mm", Package Reference=DO-214AC, Power - Peak Pulse=400W, Power Line Protection=No, Supplier Device Package=DO-214AC(SMA), Voltage - Breakdown (Min)=33.3V, Voltage - Clamping (Max) @ Ipp=48.4V, Voltage - Reverse Standoff (Typ)=30V, Applications=GeneralPurpose, Bidirectional Channels=1, Category=CircuitProtection, Datasheet URL=http://www.littelfuse.com/~/media/electronics/datasheets/tvs_diodes/littelfuse_tvs_diode_smaj_datasheet.pdf.pdf, Datasheet Version=11/2015, Family=TVS-Diodes, Manufacturer Part Number=SMAJ30CA, Manufacturer URL=http://www.littelfuse.com/, Mounting Technology=SurfaceMount, Mounting Type=SurfaceMount, Packaging=Digi-Reel®, Series=SMAJ, Type=Zener, Unidirectional Channels=-
D2: "Reverse Polarity Protection", Capacitance @ Vr, F=-, Current - Average Rectified (Io)=15A, Manufacturer="Diodes Incorporated", Operating Temperature - Junction="-65°C ~ 150°C", Package / Case="PowerDI™ 5", Supplier Device Package=PowerDI®5, Supplier Part Number 1=SBRT15U50SP5-13DICT-ND, Category="Discrete Semiconductor Products", ComponentLink1Description=https://media.digikey.com/pdf/Data%20Sheets/Diodes%20PDFs/SBRT15U50SP5.pdf, ComponentLink1URL=https://media.digikey.com/pdf/Data%20Sheets/Diodes%20PDFs/SBRT15U50SP5.pdf, Diode Type="Super Barrier", Manufacturer Part Number=SBRT15U50SP5-13, Mounting Type="Surface Mount", Packaging="Cut Tape (CT)", Part Status=Active, Pricing 1="1=0.93, 10=0.823, 100=0.6306, 500=0.49852, 1000=0.39882 (USD)", RoHS="RoHS Compliant", Speed="Fast Recovery =< 500ns, > 200mA (Io)", Stock 1=12134, Supplier 1=Digi-Key
F1: library part CMP-07399-000004-1, "FUSE BOARD MNT 500MA 50VDC 0603", Fuse Current=0.5A, Fuse Interrupt Ac Current=50A, Manufacturer="Bourns Inc.", Manufacturer Part Number=SF-0603S050-2, Max Fuse Ac Voltage=35V, Max Fuse Dc Voltage=50V, Package=SF-0603S, Resistance=232mΩ, Temperature="-20°C to +105°C", Temperature Range High=+105°C, Temperature Range Low=-20°C, Automotive=No, Category=Fuse, ComponentLink2Description=Datasheet, ComponentLink2URL=https://www.bourns.com/docs/product-datasheets/sf0603s.pdf, Device Class L1="Circuit Protection", Device Class L2=Fuses, Device Class L3=unset, Digikey Description="FUSE BOARD MNT 500MA 50VDC 0603", Fuse Blow Speed=Slow, Fuse I2T=0.009A2Sec, Fuse Interrupt Dc Current=50A, Height=0.55mm, Ipc Land Pattern Name=CAPC16080X45, Lead Free=Yes, Mouser Description="Surface Mount Fuses 0.50A Slow Blow SinglFuse", Octopart=https://octopart.com/sf-0603s050-2-bourns-10486821, RoHS=TRUE
IC1: "3V3 LDO", Arrow Part Number=LM3940IMPX-3.3/NOPB, Manufacturer_Name="Texas Instruments", Mouser Part Number=926-LM3940IMPX33NOPB, Arrow Price/Stock=https://www.arrow.com/en/products/lm3940impx-3.3nopb/texas-instruments?region=nac, Datasheet Link=http://www.ti.com/lit/ds/symlink/lm3940.pdf, Height=1.8mm, Manufacturer_Part_Number=LM3940IMPX-3.3/NOPB, Mouser Price/Stock=https://www.mouser.co.uk/ProductDetail/Texas-Instruments/LM3940IMPX-3.3-NOPB?qs=QbsRYf82W3FUgXR%252BoLZPCw%3D%3D
J1 J3: library part CMP-1502-00827-2, Contact Resistance=10mΩ, Current Rating=1.5A, Insulation Resistance=1GΩ, Max Operating Temperature=105°C, Min Operating Temperature=-40°C, Operating Supply Voltage=100V, Gender=Female, Lead Pitch=2.54mm, Length=31.01mm, NexarPartId=65687603, Number of Pins=24, Packaging="Tape and Reel", Pitch=2.54mm, RoHS=Compliant
J34: library part CMP-02766-001614-1, "CONN HEADER VERT 2POS 2MM", Contact Plating=Gold, Gender=Male, Lead Free="Lead Free", Mount="Through Hole", Number Of Contacts=2, Number Of Rows=1, Packaging=Bulk, Pitch=2mm, Radiation Hardening=No, RoHS Compliant=Yes, Termination=Solder
L1: library part SRP5030TA-100M, "10 uH Inductor", Manufacturer_Name=Bourns, Mouser Part Number=652-SRP5030TA-100M, Arrow Part Number=SRP5030TA-100M, Arrow Price/Stock=https://www.arrow.com/en/products/srp5030ta-100m/bourns?utm_currency=USD&region=nac, Datasheet Link=https://www.bourns.com/docs/Product-Datasheets/SRP5030TA.pdf, Height=3mm, Manufacturer_Part_Number=SRP5030TA-100M, Mouser Price/Stock=https://www.mouser.co.uk/ProductDetail/Bourns/SRP5030TA-100M?qs=ZwKJWZfDtNjU%2FL6UrUlO%2Fw%3D%3D
L2: library part SRP5030TA-6R8M, "6.8uH Inductor", Manufacturer_Name=Bourns, Mouser Part Number=652-SRP5030TA-6R8M, Supplier Part Number 1=SRP5030TA-6R8MCT-ND, Arrow Part Number=SRP5030TA-6R8M, Arrow Price/Stock=https://www.arrow.com/en/products/srp5030ta-6r8m/bourns?utm_currency=USD&region=nac, Datasheet Link=https://www.bourns.com/docs/Product-Datasheets/SRP5030TA.pdf, Height=3mm, Manufacturer_Part_Number=SRP5030TA-6R8M, Mouser Price/Stock=https://www.mouser.co.uk/ProductDetail/Bourns/SRP5030TA-6R8M?qs=ZwKJWZfDtNjq9Vu0UutxmQ%3D%3D, Supplier 1=DigiKey
MD1: library part CMP-157412-000001-1, "TEENSY 4.1 (HEADERS)"
NT1: "Use to tie together nets"
Q1 Q2 Q3 Q4 Q5 Q6 Q7 Q8 Q9 Q10 Q11 Q12 Q13 Q14 Q15 Q16 Q17 Q18 Q19 Q20 Q21 Q22 Q23 Q24: library part CMP-12801-000029-1, "MOSFET P-CH 20V 600MA SOT23-3", Continuous Drain Current=-600mA, Drain To Source Breakdown Voltage=-20V, Drain To Source Resistance=1.1Ω, Gate To Source Voltage=8V, Input Capacitace At Vds="175pF @ -16V", Manufacturer="Diodes Inc.", Max Forward Diode Voltage=-1.2V, Max Junction Temp=+150°C, Package=SOT23, Power Dissipation=550mW, Pulse Drain Current=-1.9A, Temperature="-55°C to +150°C", Temperature Range Low=-55°C, Automotive=No, Category=Trans, ComponentLink2Description=Datasheet, ComponentLink2URL=https://www.diodes.com/assets/Datasheets/ds30933.pdf, Depletion Mode=False, Device Class L1="Discrete Semiconductors", Device Class L2=Transistors, Device Class L3=MOSFETs, Digikey Description="MOSFET P-CH 20V 600MA SOT23-3", Drain To Source Voltage=-20V, Footprint Url=https://www.diodes.com/assets/Package-Files/SOT23.pdf, Height=1.1mm, Lead Free=Yes, Manufacturer Part Number=DMP2004K-7, Mouser Description="MOSFET P-Channel", Number Of Channels=1, Number Of P Channels=1, Octopart=https://octopart.com/dmp2004k-7-diodes+inc.-7151877, RoHS=TRUE, Rthja Max=227°C/W, Standoff Height=0.013mm, Temperature Range High=+150°C, Threshold Vgs Max=-1V, Threshold Vgs Min=-0.5V, Turn Off Delay Time=20.2ns, Turn On Delay Time=8.5ns
R11: library part RT0603BRE0751KL, "RES 51K 0.1% SM0603 YAGEO RC_L", Manufacturer=Yageo, Manufacturer Part Number=RC0603FR-071KL, Package=0603, Power (Watts)=0.1, Resistance (Ohms)=1000, Supplier Part Number 1=YAG4750CT-ND, Tolerance (%)=1, Category=Resistor, ComponentLink1Description="Manufacturer Website", ComponentLink1URL=http://www.yageo.com, Supplier 1=Digikey
R17: library part RC0603FR-0788K7L, "RES 88K7 SM0603 YAGEO RC_L", Manufacturer=Yageo, Manufacturer Part Number=RC0603FR-0782KL, Package=0603, Power (Watts)=0.1, Resistance (Ohms)=82000, Supplier Part Number 1=9238719, Tolerance (%)=1, Category=Resistor, ComponentLink1Description="Manufacturer Website", ComponentLink1URL=http://www.yageo.com, Supplier 1=Farnell, Supplier 2=Digi-Key, Supplier Part Number 2=311-82.0KHRCT-ND
R18: library part RC0603FR-0722K1L, "RES 22K1 SM0603 YAGEO RC_L", Manufacturer=Yageo, Manufacturer Part Number=RC0603FR-0722KL, Package=0603, Power (Watts)=0.1, Resistance (Ohms)=22000, Supplier Part Number 1=9238646, Tolerance (%)=1, Category=Resistor, ComponentLink1Description="Manufacturer Website", ComponentLink1URL=http://www.yageo.com, Supplier 1=Farnell, Supplier 2=Digi-Key, Supplier Part Number 2=311-22.0KHRCT-ND
R19: library part RT0603BRD0722K1L, "RES 22K1 0.1% SM0603 YAGEO RC_L", Manufacturer=Yageo, Manufacturer Part Number=RC0603FR-071KL, Package=0603, Power (Watts)=0.1, Resistance (Ohms)=1000, Supplier Part Number 1=YAG1590CT-ND, Tolerance (%)=1, Category=Resistor, ComponentLink1Description="Manufacturer Website", ComponentLink1URL=http://www.yageo.com, Supplier 1=Digikey
U1 U9: "Buck Converter", Manufacturer 1="Texas Instruments", Manufacturer Part Number 1=LMR23630AFQDDARQ1, Max Operating Temperature=125°C, Min Operating Temperature=-40°C, Supplier Part Number 1=296-45260-1-ND, Pricing 1="1=3.97, 10=3.564, 100=2.9204, 500=2.486, 1000=2.0967 (USD)", Stock 1=2872, Supplier 1=Digi-Key
U7 U8 U10: library part CMP-14351-000006-1, "IC SHIFT REGISTER 8BIT 16SOIC", RoHS Compliant=Yes
U11 U12 U13 U14 U15 U16 U17 U19 U20 U21 U22 U23 U24 U28 U29 U30 U31 U32 U33 U34 U35 U36 U37 U38 U39: library part "OpAmp with power terminals", GAIN=1Meg, SimulationGenericComponent=True
U18 U26 U27: library part CMP-0188-00351-3, "IC ADC 10BIT SAR 16SOIC", Case/Package=SOIC, Max Operating Temperature=85°C, Max Supply Voltage=5.5V, Min Operating Temperature=-40°C, Min Supply Voltage=2.7V, Nominal Supply Current=425uA, Operating Supply Voltage=5V, Output Voltage=4.1V, Package Quantity=2600, Contact Plating=Tin, Conversion Rate=200KS/s, Differential Nonlinearity=1LSB, Full Scale Error=1LSB, Integral Nonlinearity (INL)=1LSB, Interface=SPI, Lead Free="Lead Free", Mount="Surface Mount", Number of A/D Converters=1, Number of Bits=10, Number Of Channels=8, Number of Converters=1, Number of Elements=1, Number of Pins=16, Packaging="Tape and Reel", Polarity=Unipolar, Radiation Hardening=No, REACH SVHC="No SVHC", Resolution=10b, Sampling Rate=200KS/s, Signal to Noise Ratio (SNR)=200dB, Supply Type=Single
C9 C10 C11 C12 C13 C14 C17 C18 C19 C20 C21 C22 C26 C27 C28 C29 C30 C31 C34 C35 C36 C37 C38 C39: SimulationGenericComponent=True
R1 R2 R3 R4 R5 R6 R7 R8 R9 R10 R12 R13 R14 R15 R16 R20 R21 R22 R23 R24 R25 R26 R27 R28 R29 R30 R31 R32 R33: SimulationGenericComponent=True, TC1=0, TC2=0

## Via types
v1: diameter 20, hole 10, Top Layer to Bottom Layer, tented both sides, 12 vias

## Nets (pads, with @x,y where several pads share a name; then routed paths per layer and width w, separated by ;. In a path a pad name is that pad's centre, name@x,y a point inside that pad or via, vN(x,y) a via of type N, cw(c..) or ccw(c..) an arc to the next point about the centre after c; other vN are vias at no path point)
2.00V: U12.2 U13.2 U14.2 U15.2 U16.2 U17.2 U19.2 U20.2 U21.2 U22.2 U23.2 U24.2 U28.2 U29.2 U30.2 U31.2 U32.2 U33.2 U34.2 U35.2 U36.2 U37.2 U38.2 U39.2
5V: C16.1 U1.5 U1.7
AGND: C32.2 C33.2 IC1.2 IC1.4 NT1.2 U18.14 U26.14 U27.14
AVCC_3V3: C33.1 IC1.3 Q1.2 Q2.2 Q3.2 Q4.2 Q5.2 Q6.2 Q7.2 Q8.2 Q9.2 Q10.2 Q11.2 Q12.2 Q13.2 Q14.2 Q15.2 Q16.2 Q17.2 Q18.2 Q19.2 Q20.2 Q21.2 Q22.2 Q23.2 Q24.2 U18.15 U26.15 U27.15
CH0: Q1.1 U7.15
CH0_IN: C34.2 R28.2 U18.1 U34.3
CH1: Q21.1 U7.1
CH1_IN: C9.2 R3.2 U12.3 U18.8
CH2: Q10.1 U7.2
CH2_IN: C26.2 R22.2 U18.7 U28.3
CH3: Q13.1 U7.3
CH3_IN: C17.2 R10.2 U18.6 U19.3
CH4: Q3.1 U7.4
CH4_IN: C35.2 R29.2 U18.5 U35.3
CH5: Q22.1 U7.5
CH5_IN: C10.2 R4.2 U13.3 U18.4
CH6: Q8.1 U7.6
CH6_IN: C27.2 R23.2 U18.3 U29.3
CH7: Q14.1 U7.7
CH7_IN: C18.2 R12.2 U18.2 U20.3
CH8: Q4.1 U8.15
CH8_IN: C36.2 R30.2 U26.1 U36.3
CH9: Q23.1 U8.1
CH9_IN: C11.2 R5.2 U14.3 U26.2
CH10: Q11.1 U8.2
CH10_IN: C28.2 R24.2 U26.3 U30.3
CH11: Q15.1 U8.3
CH11_IN: C19.2 R13.2 U21.3 U26.4
CH12: Q5.1 U8.4
CH12_IN: C37.2 R31.2 U26.5 U37.3
CH13: Q24.1 U8.5
CH13_IN: C13.2 R7.2 U16.3 U26.6
CH14: Q12.1 U8.6
CH14_IN: C29.2 R25.2 U26.7 U31.3
CH15: Q16.1 U8.7
CH15_IN: C21.2 R15.2 U23.3 U26.8
CH16: Q7.1 U10.15
CH16_IN: C38.2 R32.2 U27.8 U38.3
CH17: Q20.1 U10.1
CH17_IN: C14.2 R8.2 U17.3 U27.7
CH18: Q9.1 U10.2
CH18_IN: C30.2 R26.2 U27.6 U32.3 | length 217
  Top Layer w10: R26.2 5405.41,7209.41 U32.3
CH19: Q18.1 U10.3
CH19_IN: C22.2 R16.2 U24.3 U27.5 | length 215.9
  Top Layer w10: R16.2 5402.59,7014.41 U24.3
CH20: Q6.1 U10.4
CH20_IN: C39.2 R33.2 U27.4 U39.3 | length 216.6
  Top Layer w10: R33.2 5404.41,6849.41 U39.3
CH21: Q19.1 U10.5
CH21_IN: C12.2 R6.2 U15.3 U27.3 | length 214
  Top Layer w10: R6.2 5398,6655 U15.3
CH22: Q2.1 U10.6
CH22_IN: C31.2 R27.2 U27.2 U33.3 | length 213.4
  Top Layer w10: R27.2 5396.59,6474.41 U33.3
CH23: Q17.1 U10.7
CH23_IN: C20.2 R14.2 U22.3 U27.1 | length 212.8
  Top Layer w10: R14.2 5395.18,6293.82 U22.3
CLOCK: MD1.3 U7.11 U8.11 U10.11
CS1: MD1.5 R9.1 U18.10
CS2: MD1.6 R20.1 U26.10
CS3: MD1.7 R21.1 U27.10
GND: C1.2 C2.2 C5.2 C8.1 C16.2 C24.2 C25.2 C40.1 D1.1 MD1.43 MD1.45 MD1.46 NT1.1 R18.1 R19.1 U1.6 U1.8 U1.9 U7.8 U7.13 U8.8 U8.13 U9.6 U9.8 U9.9 U10.8 U10.13 U11.4 U12.5 U13.5 U14.5 U15.5 U16.5 U17.5 U18.9 U19.5 U20.5 U21.5 U22.5 U23.5 U24.5 U26.9 U27.9 U28.5 U29.5 U30.5 U31.5 U32.5 U33.5 U34.5 U35.5 U36.5 U37.5 U38.5 U39.5
  other v1: 3979.41,4571.69 4030.59,4571.69 3979.41,4615 4030.59,4615 3979.41,4662.24 4030.59,4662.24 4214.41,4971.69 4265.59,4971.69 4214.41,5015 4265.59,5015 4214.41,5062.24 4265.59,5062.24
LATCH: MD1.4 U7.12 U8.12 U10.12
MISO: MD1.12 U18.12 U26.12 U27.12
MOSI: MD1.11 U18.11 U26.11 U27.11
NetC2_1: C2.1 U9.3
NetC3_1: C3.1 U9.2
NetC3_2: C3.2 L1.1 U9.1
NetC4_2: C4.2 R17.1 R18.2 U9.4
NetC6_1: C6.1 U8.10 U8.16
NetC7_1: C7.1 U10.10 U10.16
NetC9_1: C9.1 J3.2 R3.1 U12.1
NetC10_1: C10.1 J3.6 R4.1 U13.1
NetC11_1: C11.1 J3.10 R5.1 U14.1
NetC12_1: C12.1 J3.22 R6.1 U15.1 | length 222.6
  Top Layer w10: R6.1 5408,6717 5531.56,6717 5542.38,6706.18 U15.1
NetC13_1: C13.1 J3.14 R7.1 U16.1
NetC14_1: C14.1 J3.18 R8.1 U17.1
NetC15_1: C15.1 U1.2
NetC15_2: C15.2 L2.1 U1.1
NetC17_1: C17.1 J3.4 R10.1 U19.1
NetC18_1: C18.1 J3.8 R12.1 U20.1
NetC19_1: C19.1 J3.12 R13.1 U21.1
NetC20_1: C20.1 J3.24 R14.1 U22.1 | length 221.4
  Top Layer w10: R14.1 5408,6353 5533.56,6353 5541.56,6345 U22.1
NetC21_1: C21.1 J3.16 R15.1 U23.1
NetC22_1: C22.1 J3.20 R16.1 U24.1 | length 224.5
  Top Layer w10: R16.1 5408,7081 5529.56,7081 5544.97,7065.59 U24.1
NetC23_2: C23.2 R11.1 R19.2 U1.4
NetC26_1: C26.1 J3.3 R22.1 U28.1
NetC27_1: C27.1 J3.7 R23.1 U29.1
NetC28_1: C28.1 J3.11 R24.1 U30.1
NetC29_1: C29.1 J3.15 R25.1 U31.1
NetC30_1: C30.1 J3.19 R26.1 U32.1 | length 217
  Top Layer w10: R26.1 5405.41,7260.59 U32.1
NetC31_1: C31.1 J3.23 R27.1 U33.1 | length 222
  Top Layer w10: R27.1 5408,6535 5532.56,6535 5541.97,6525.59 U33.1
NetC34_1: C34.1 J3.1 R28.1 U34.1
NetC35_1: C35.1 J3.5 R29.1 U35.1
NetC36_1: C36.1 J3.9 R30.1 U36.1
NetC37_1: C37.1 J3.13 R31.1 U37.1
NetC38_1: C38.1 J3.17 R32.1 U38.1
NetC39_1: C39.1 J3.21 R33.1 U39.1 | length 217.4
  Top Layer w10: R33.1 5406.41,6900.59 U39.1
NetC40_2: C40.2 U1.3
NetD1_2: D1.2 D2.1 F1.2
NetJ1_1: J1.1 Q1.3
NetJ1_2: J1.2 Q21.3
NetJ1_3: J1.3 Q10.3
NetJ1_4: J1.4 Q13.3
NetJ1_5: J1.5 Q3.3
NetJ1_6: J1.6 Q22.3
NetJ1_7: J1.7 Q8.3
NetJ1_8: J1.8 Q14.3
NetJ1_9: J1.9 Q4.3
NetJ1_10: J1.10 Q23.3
NetJ1_11: J1.11 Q11.3
NetJ1_12: J1.12 Q15.3
NetJ1_13: J1.13 Q5.3
NetJ1_14: J1.14 Q24.3
NetJ1_15: J1.15 Q12.3
NetJ1_16: J1.16 Q16.3
NetJ1_17: J1.17 Q7.3
NetJ1_18: J1.18 Q20.3
NetJ1_19: J1.19 Q9.3
NetJ1_20: J1.20 Q18.3
NetJ1_21: J1.21 Q6.3
NetJ1_22: J1.22 Q19.3
NetJ1_23: J1.23 Q2.3
NetJ1_24: J1.24 Q17.3
NetJ34_2: J34.2 MD1.42
NetR1_1: R1.1 R2.2 U11.2
NetU7_9: U7.9 U8.14
NetU8_9: U8.9 U10.14
NetU11_1: U11.1 U11.3
SCK: MD1.13 U18.13 U26.13 U27.13
SER1: MD1.2 U7.14
VBAT_RAW: F1.1
VCC_3V3: C6.2 C7.2 C8.2 C23.1 C24.1 C25.1 L2.2 R9.2 R11.2 R20.2 R21.2 U7.10 U7.16 U11.5 U12.4 U13.4 U14.4 U15.4 U16.4 U17.4 U18.16 U19.4 U20.4 U21.4 U22.4 U23.4 U24.4 U26.16 U27.16 U28.4 U29.4 U30.4 U31.4 U32.4 U33.4 U34.4 U35.4 U36.4 U37.4 U38.4 U39.4
VCC_5V: C4.1 C5.1 C32.1 IC1.1 J34.1 L1.2 R17.2
VCC_12V: C1.1 D2.2 U9.5 U9.7
pads on no net: J1.25 J1.26 J3.25 J3.26 MD1.0 MD1.1 MD1.8 MD1.9 MD1.10 MD1.14 MD1.15 MD1.16 MD1.17 MD1.18 MD1.19 MD1.20 MD1.21 MD1.22 MD1.23 MD1.24 MD1.25 MD1.26 MD1.27 MD1.28 MD1.29 MD1.30 MD1.31 MD1.32 MD1.33 MD1.34 MD1.35 MD1.36 MD1.37 MD1.38 MD1.39 MD1.40 MD1.41 MD1.44 MD1.47 R1.2 R2.1 U10.9

## Silkscreen, mask and mechanical layers (free items; w line width, h text height)
Mechanical 1:
  lines w10: 0,1510 5780,1510 5780,9870 0,9870 0,1510 ; 3030,7860 3325,7860 3325,8145 3030,8145 3030,7860